# Altium PCB QN8027_89C52.PcbDoc
Units mil, origin at the board's own origin, x right, y up, seen from the top; angles counter-clockwise.
Board outline 3937.01 x 3937.01 mil, 2 copper layers (Top Layer, Bottom Layer); 41 components, 35 nets, 163 pads, 23 vias.
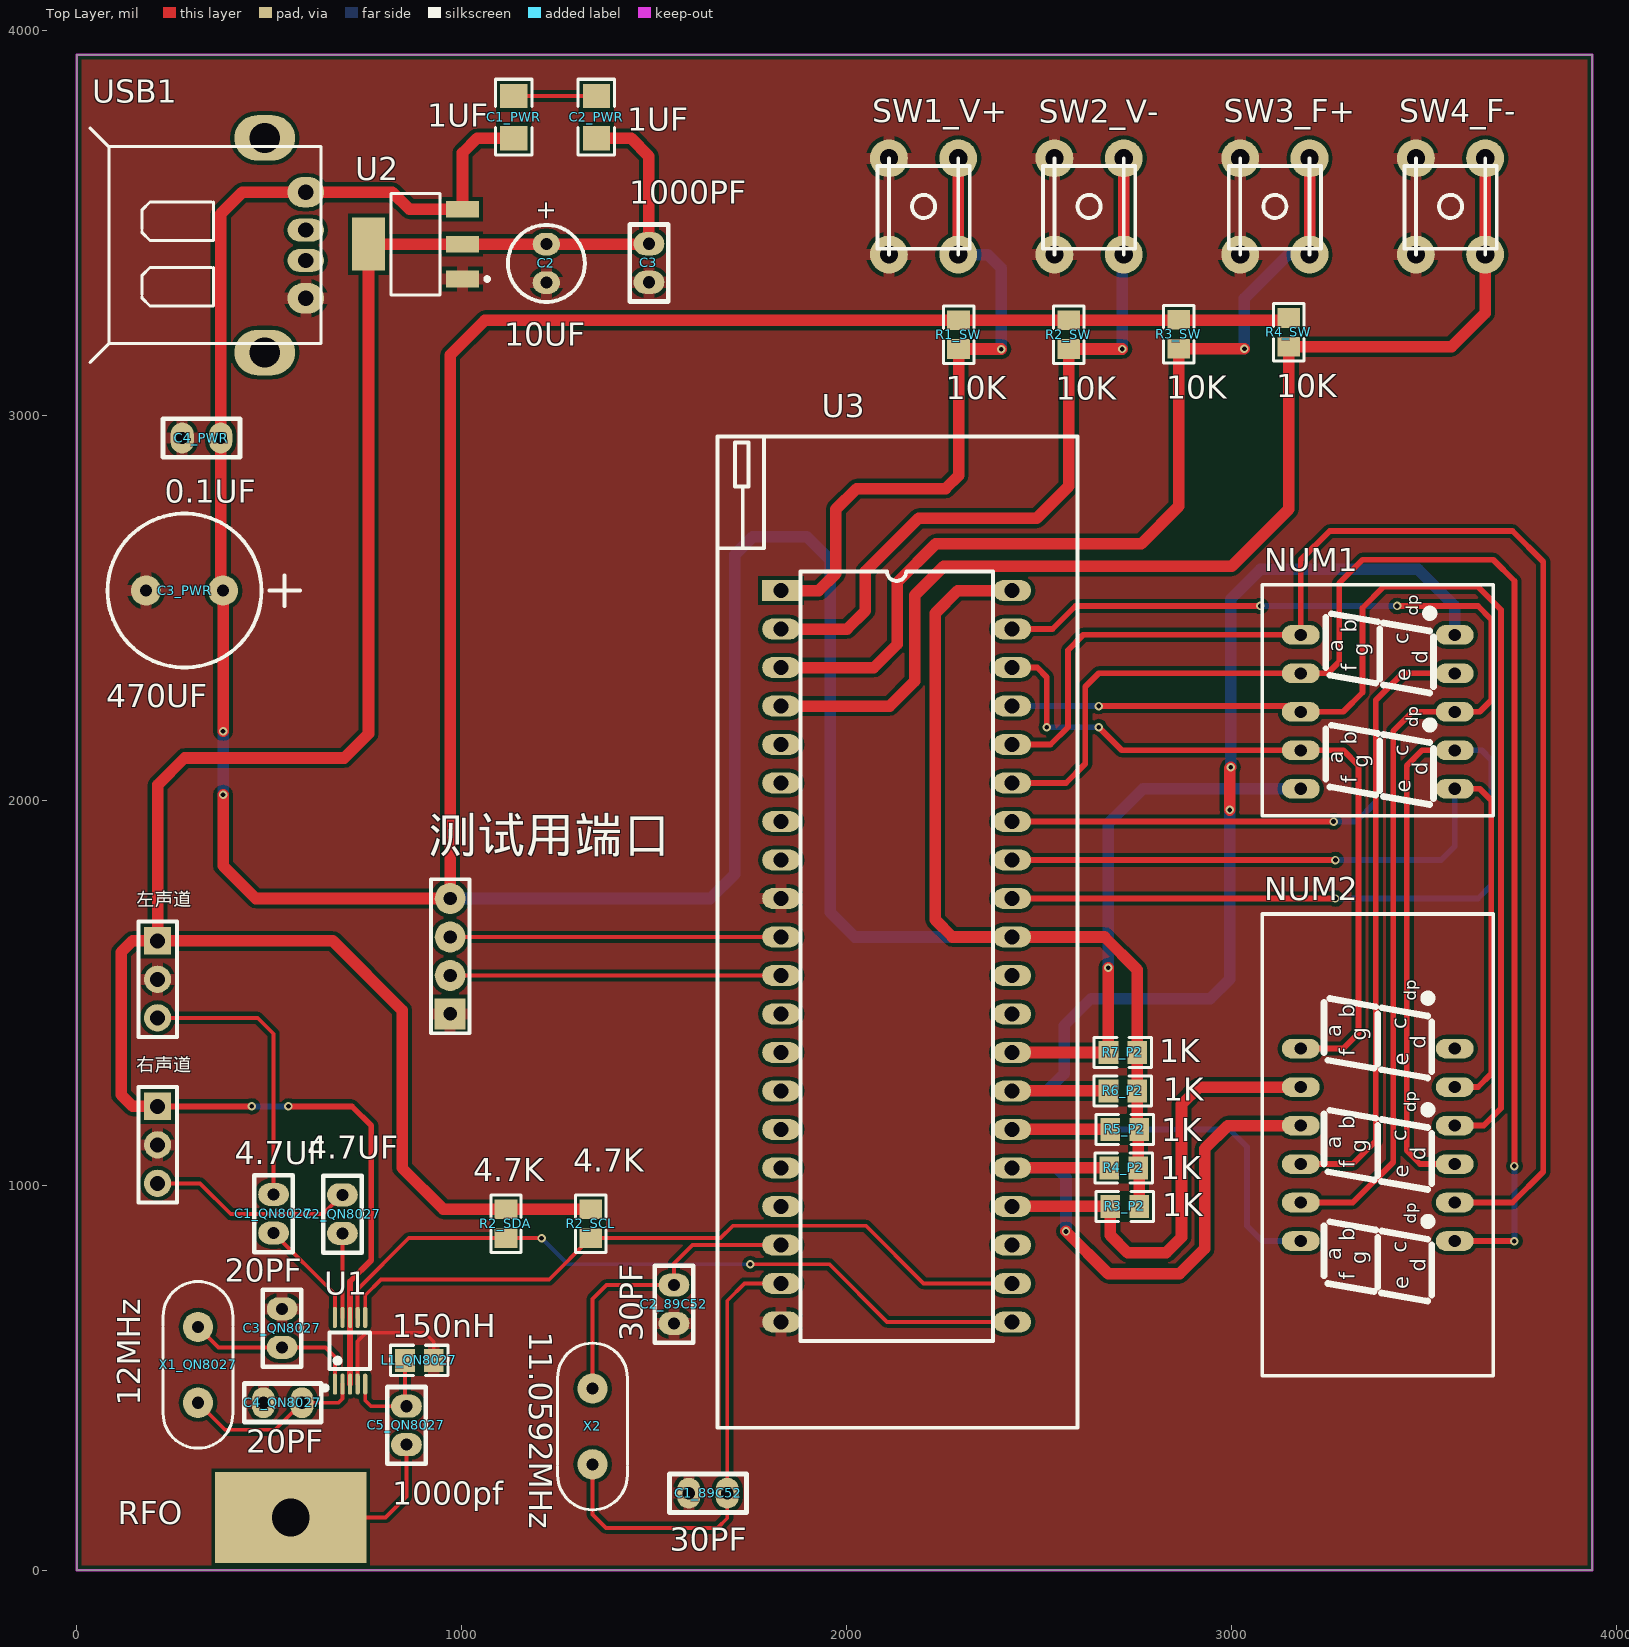
[diagram p0: Top Layer view]
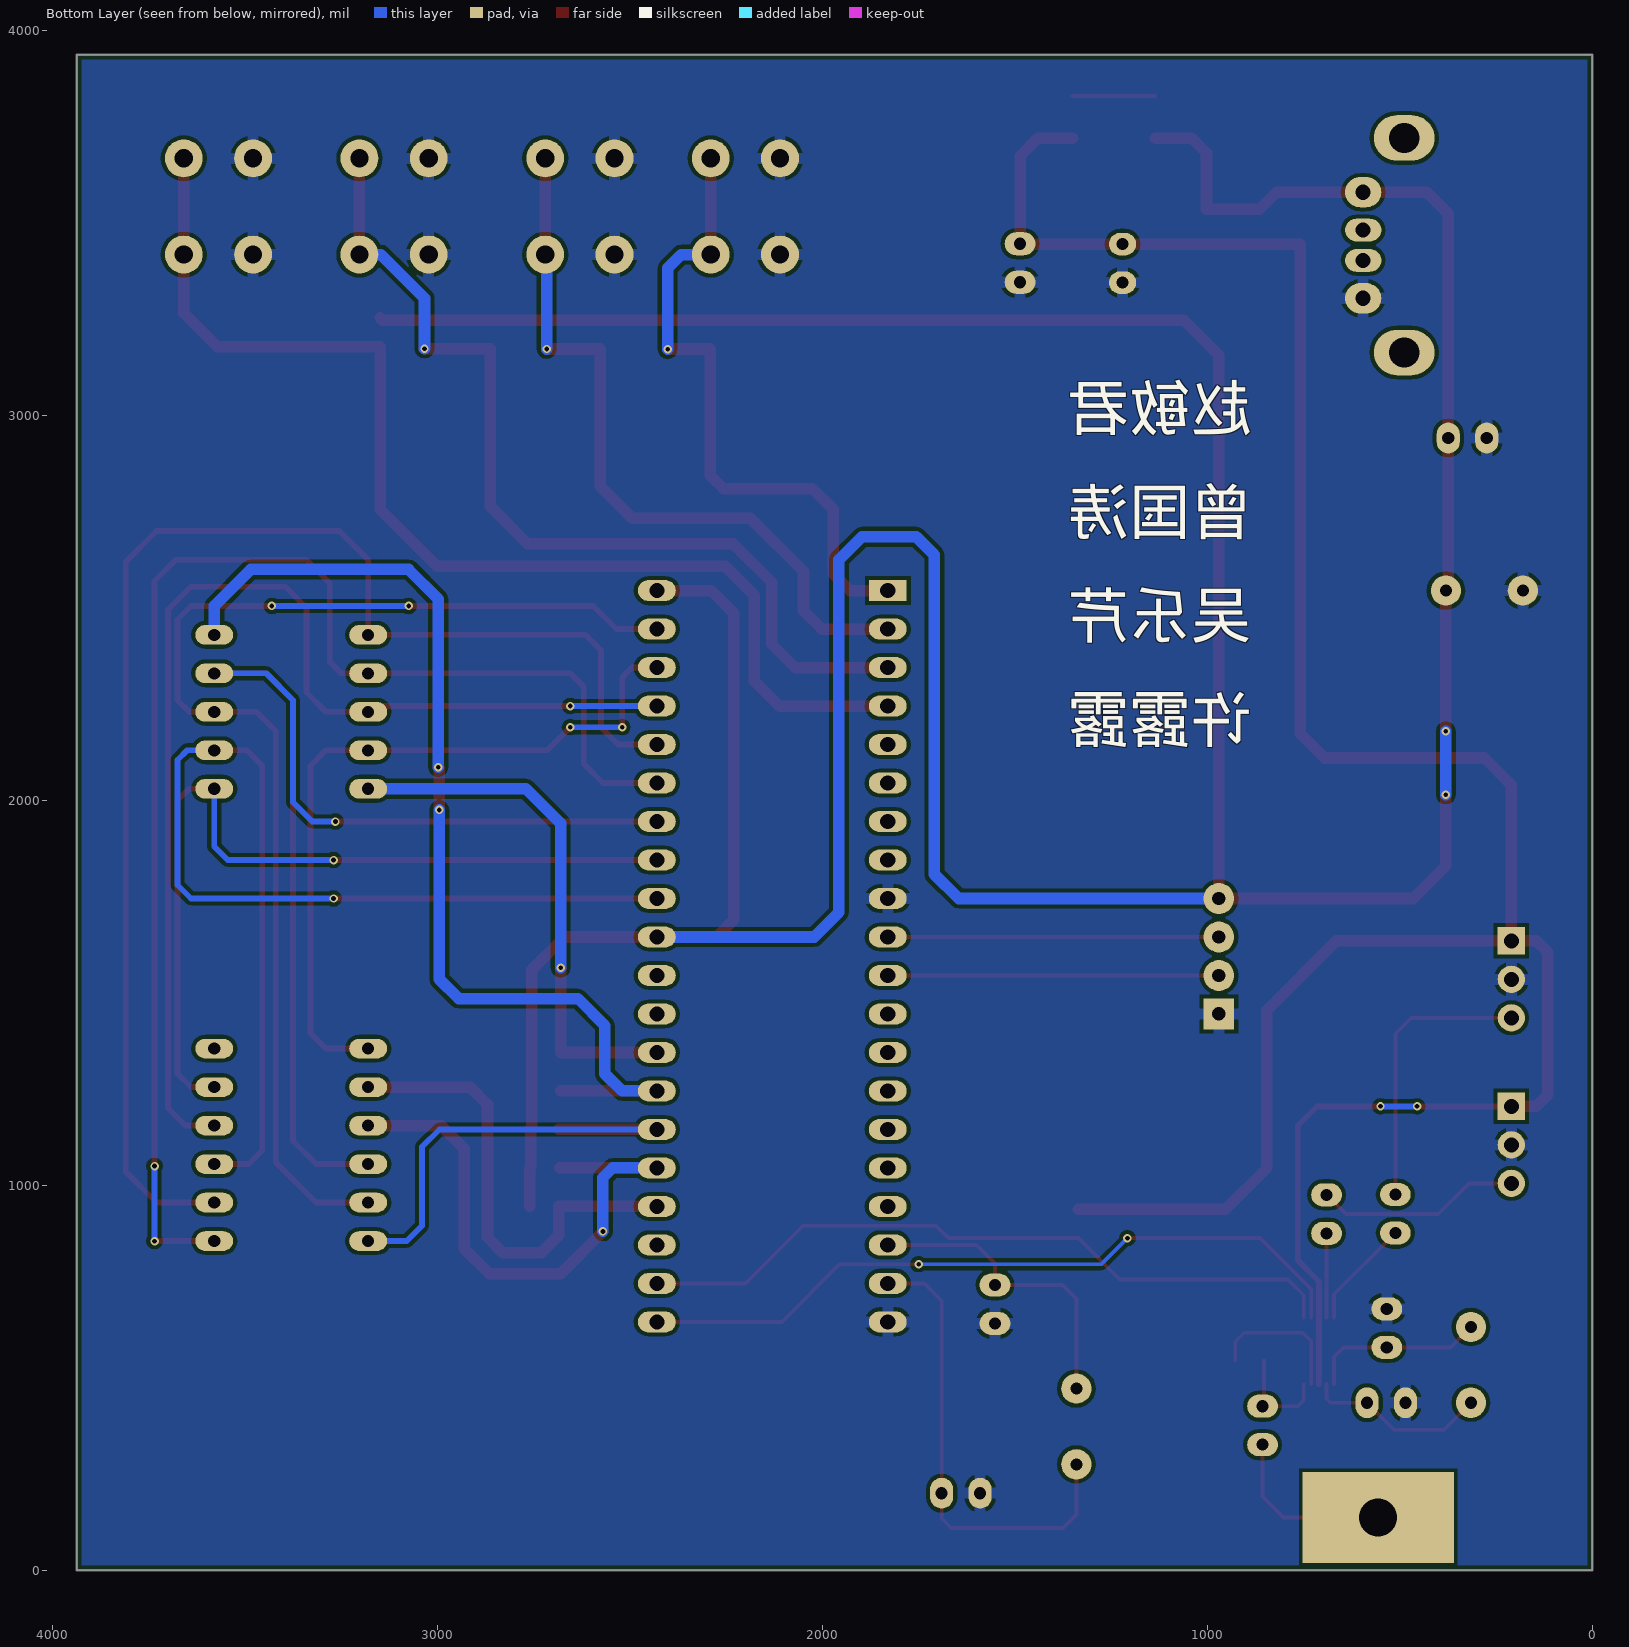
[diagram p1: Bottom Layer view, seen from below]
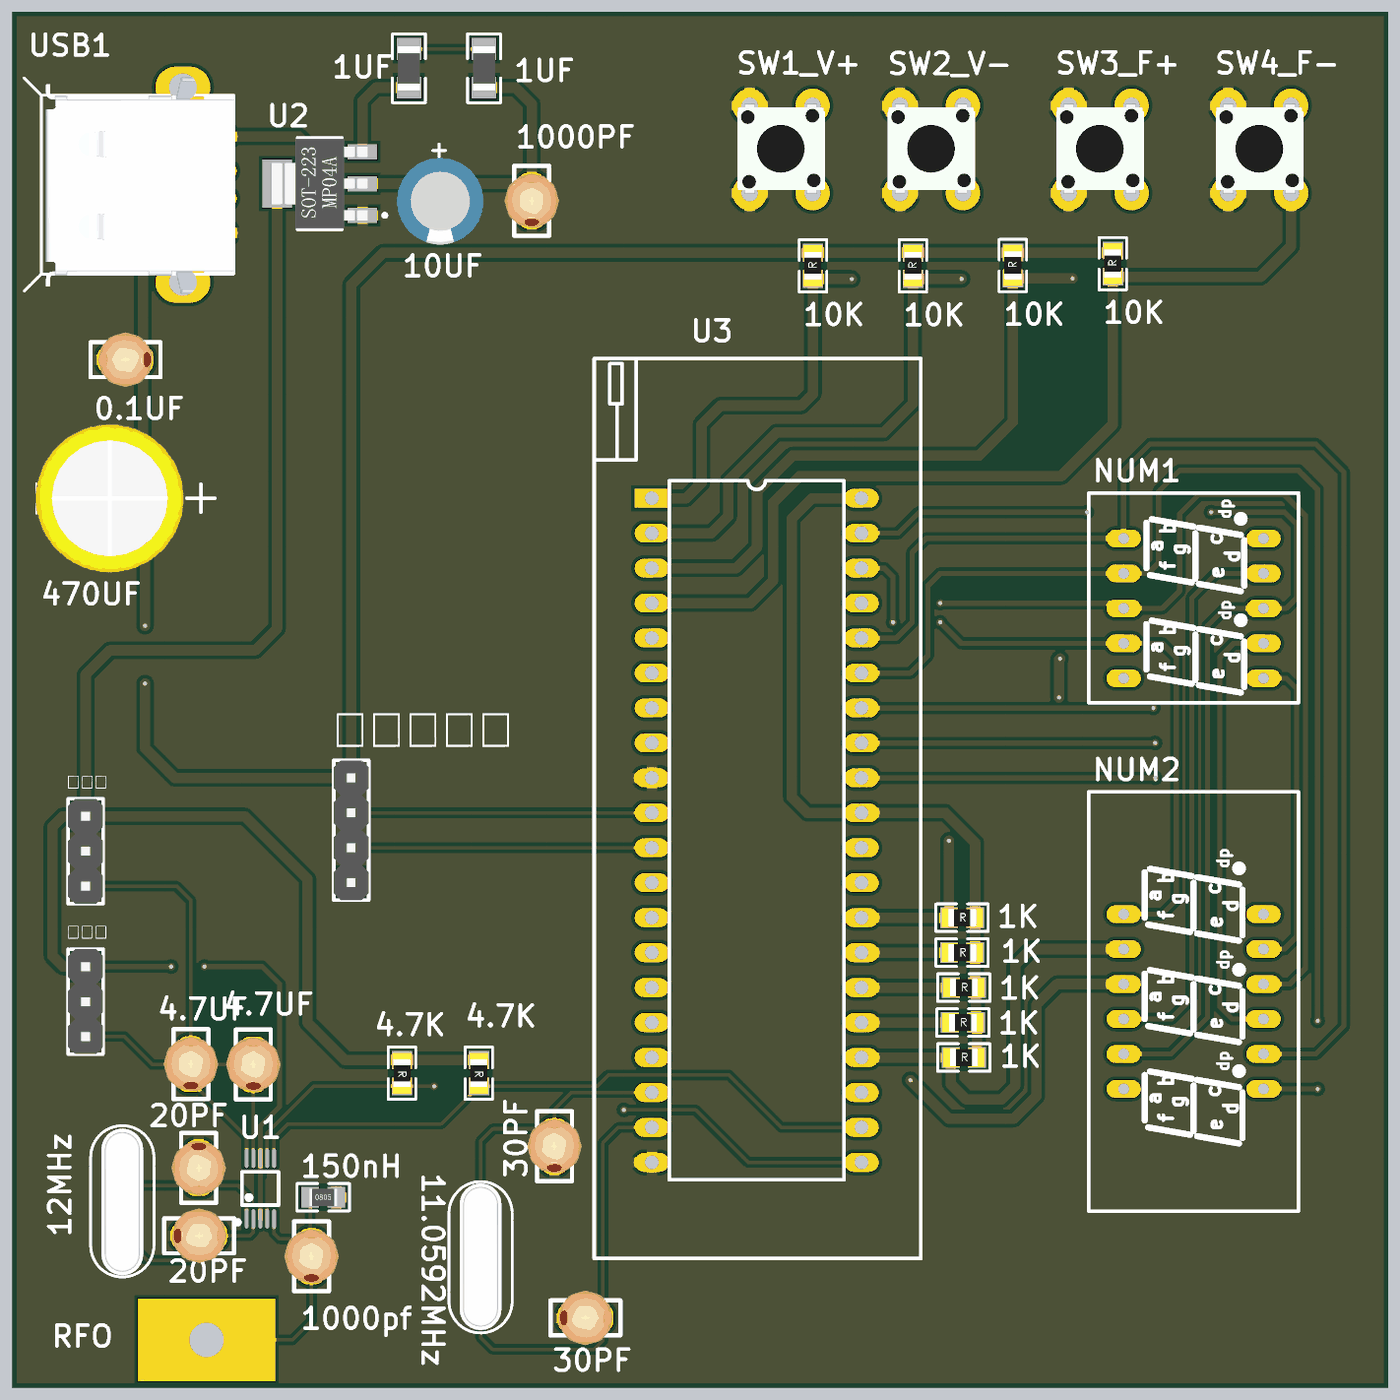
[diagram p2: 3D render of the assembled board from above, using the file's embedded part models]

## Layer stack, top to bottom
Top Solder: solder mask 0.4, Solder Resist, Dk 3.5
Top Layer: signal copper 1.4
Dielectric 1: dielectric 12.6, FR-4, Dk 4.8
Bottom Layer: signal copper 1.4
Bottom Solder: solder mask 0.4, Solder Resist, Dk 3.5

## Board outline
0,0 3937.01,0 3937.01,3937.01 0,3937.01

## Design rules (kind name [scope] priority, off if disabled: settings)
Clearance [(IsTrack) vs (IsTrack)] p1 off: gap=12
Clearance POLY [InPolygon] p2: gap=10
Clearance VIA-POLY [ISVIA vs InPolygon] p3: gap=6
Clearance all [All] p4: gap=6
DiffPairsRouting DiffPair_90DiffPairsRouting [InDifferentialPairClass('90OM')] p1: maxlimit=7 minlimit=7 mostfreqgap=7 toplayer_minwidth=6 toplayer_maxwidth=6 toplayer_prefwidth=6 bottomlayer_minwidth=6 bottomlayer_maxwidth=6 bottomlayer_prefwidth=6 maxuncoupledlength=500
MatchedLengths DiffPair_90MatchedLengths [InDifferentialPair ('D_D')] p1: tolerance=1000 checknetsindiffpair=FALSE checkdiffpairvsdiffpair=TRUE checkxsignals=TRUE checkothers=TRUE
PolygonConnect PolygonConnect_1 [ISVIA] p1: connectstyle=Direct reliefconductorwidth=10 reliefentries=4 polygonreliefangle="90 Angle" airgapwidth=10
PolygonConnect [All] p2: connectstyle=Relief reliefconductorwidth=30 reliefentries=4 polygonreliefangle="90 Angle" airgapwidth=10
RoutingVias [All] p1: holewidth=12 width=22 viastyle="Through Hole" minholewidth=12 minwidth=22 maxholewidth=12 maxwidth=22
SilkToSilkClearance [All] p1: silktosilkclearance=2
SilkToSolderMaskClearance [IsPad] p1: minsilkscreentomaskgap=2 clearancetoexposedcopper=TRUE
SolderMaskExpansion [All] p1: expansion=2.5
Width PWR [InNetClass('PWR')] p1: maxlimit=60 minlimit=6 preferedwidth=15
Width [All] p2: maxlimit=45 minlimit=6 preferedwidth=6
27 further rules are at their usual default settings.

## Classes and differential pairs
net class PWR: 3.3V 5V

## Components (designator, comment, footprint, x,y, rotation, side; value= is the part's Value field where it differs from the comment)
C1_89C52 "30PF" RAD-0.1 1638.94,201.38 r180 top
C1_PWR "1UF" 1206 1135,3775 r90 top
C1_QN8027 "4.7UF" RAD-0.1 510,925 r270 top
C2 "10UF" RB.1/.2 1220,3345 r90 top
C2_89C52 "30PF" RAD-0.1 1550,690 r270 top
C2_PWR "1UF" 1206 1350,3775 r90 top
C2_QN8027 "4.7UF" RAD-0.1 688.62,923.94 r270 top
C3 "1000PF" RAD-0.1 1485,3395 r270 top
C3_PWR "470UF" RB.2/.4 180,2545 r0 top
C3_QN8027 "20PF" RAD-0.1 535,630 r90 top
C4_PWR "0.1UF" RAD-0.1 325,2940 r0 top
C4_QN8027 "20PF" RAD-0.1 533.94,436.38 r180 top
C5_QN8027 "1000pf" RAD-0.1 855,375 r270 top
L1_QN8027 "150nH" 0805 890,545 r0 top
NUM1 "LEDNUM_2位7段数码管共阳极" LEDNUM_2位7段数码管 3180,2030 r90 top
NUM2 "频率" LEDNUM_3位7段数码管 3180,855 r90 top
R1_SW "10K" "0805 RES" 2291,3210 r90 top
R2_SCL "4.7K" "0805 RES" 1335,900 r270 top
R2_SDA "4.7K" "0805 RES" 1115,900 r270 top
R2_SW "10K" "0805 RES" 2577,3210 r90 top
R3_P2 "1K" "0805 RES" 2722.6,945 r0 top
R3_SW "10K" "0805 RES" 2863,3211 r90 top
R4_P2 "1K" "0805 RES" 2720,1045 r0 top
R4_SW "10K" "0805 RES" 3149,3216 r90 top
R5_P2 "1K" "0805 RES" 2722.6,1145 r0 top
R6_P2 "1K" "0805 RES" 2717.6,1245 r0 top
R7_P2 "1K" "0805 RES" 2717.6,1345 r0 top
RFO "天线贴片" 天线贴孔 556,137 r180 top
SW1_V+ "6*6" 6*6按键开关 2110,3668 r0 top
SW2_V- "6*6_4脚按键开关" 6*6按键开关 2540,3668 r0 top
SW3_F+ "6*6_4脚按键开关" 6*6按键开关 3022.67,3668 r0 top
SW4_F- "6*6_4脚按键开关" 6*6按键开关 3479,3668 r0 top
U1 "QN8027_MSOP10" MSOP-10 710,570 r0 top
U2 "AMS1117" SOT223 880,3445 r90 top
U3 "STC89C52_Plug" ZIF40 1830,2545 r0 top
USB1 "USB母口" USB-A 595,3580 r180 top
X1_QN8027 "12MHz" XTAL1 315,631.85 r270 top
X2 "11.0592MHz" XTAL1 1340,275 r90 top
右声道 "HEADER_Plug_1*3" HDR1*3 210,1205 r0 top
左声道 "HEADER_Plug_1*3" HDR1*3 210,1635 r0 top
测试用端口 "HEADER_Plug_1*4" HDR1*4 970,1445 r180 top

## Footprints (in the part's own frame and the unit in brackets; to place one, negate y for a bottom-side part, rotate by r counter-clockwise, add the part's x,y. Pads: shape width x height; smd on the part's side, far side on the other; paste and mask are expansions set on the pad)
6*6按键开关 [mm]
  round 2.5 hole 1.2: 1(0,-6.35) 1(0,0) 2(4.572,-6.35) 2(4.572,0)
  silkscreen extent -0.76,-6.35 5.33,0, body extent -0.84,-6.4 5.36,0.15, height 5
0805 [mm]
  rect 1.3x1.5 smd: 1(-0.95,0) 2(0.95,0)
  silkscreen extent -1.9,-1 1.9,1, body extent -1,-0.63 1,0.63, height 0.55
"0805 RES" [mm]
  rect 1.3x1.5 smd: 1(-0.95,0) 2(0.95,0)
  silkscreen extent -1.9,-1 1.9,1, body extent -1.49,-0.7 1.51,0.7, height 0.53
1206 [mm]
  rect 1.6x1.8 smd: 1(-1.4,0) 2(1.4,0)
  silkscreen extent -2.5,-1.2 2.5,1.2, body extent -1.6,-0.81 1.6,0.81, height 0.61
HDR1*3 [mm]
  rect 1.8x1.8 hole 1: 1(0,0)
  round 1.8 hole 1: 2(0,-2.54) 3(0,-5.08)
  silkscreen extent -1.27,-6.35 1.27,1.27, body extent -1.27,-6.35 1.27,1.27, height 8.54
HDR1*4 [mil]
  rect 80x80 hole 35: 1(0,0)
  round 80 hole 35: 2(0,-100) 3(0,-200) 4(0,-300)
  silkscreen extent -50,-350 50,50, body extent -50,-350 50,50, height 336
LEDNUM_2位7段数码管 [mm]
  oval 1.3x2.5 hole 0.8: 1(0,-10.16) 2(2.54,-10.16) 3(5.08,-10.16) 4(7.62,-10.16) 5(10.16,-10.16) 6(10.16,0) 7(7.62,0) 8(5.08,0) 9(2.54,0) 10(0,0)
  silkscreen extent -1.78,-12.7 13.46,2.54
LEDNUM_3位7段数码管 [mm]
  oval 1.3x2.5 hole 0.8: 1(0,-10.16) 2(2.54,-10.16) 3(5.08,-10.16) 4(7.62,-10.16) 5(10.16,-10.16) 6(12.7,-10.16) 7(12.7,0) 8(10.16,0) 9(7.62,0) 10(5.08,0) 11(2.54,0) 12(0,0)
  silkscreen extent -8.89,-12.7 21.59,2.54
MSOP-10 [mm]
  oval 0.28x1.4 smd mask+0.051: 1(-1,-2.2) 2(-0.5,-2.2) 3(0,-2.2) 4(0.5,-2.2) 5(1,-2.2) 6(1,2.2) 7(0.5,2.2) 8(0,2.2) 9(-0.5,2.2) 10(-1,2.2)
  silkscreen extent -1.8,-2.6 1.33,1.2
RAD-0.1 [mil]
  oval 60x80 hole 31.5: 1(-51.06,1.38) 2(48.94,1.38)
  silkscreen extent -101,-49 99,51, body extent -79,-77 77,80, height 291
RB.1/.2 [mm]
  oval 1.5x1.8 hole 0.8: 1(2.54,0) 2(0,0)
  silkscreen extent -1.27,-2.54 3.81,2.54, body extent -1.88,-3.26 4.42,3.04, height 11.5
RB.2/.4 [mm]
  round 2 hole 0.8: 1(5.08,0) 2(0,0)
  silkscreen extent -2.54,-5.08 10.16,5.08, body extent -2.89,-5.41 7.92,5.39, height 13
SOT223 [mm]
  rect 1.1x2.15 smd: 1(-2.3,-3.1) 2(0,-3.1) 3(2.3,-3.1)
  rect 3.5x2.15 smd: 2(0,3.1)
  silkscreen extent -3.35,-4.85 3.35,1.63, body extent -3.25,-3.48 3.25,3.48, height 1.7
USB-A [mm]
  oval 4x3 hole 2: 0(2.71,10.58) 0(2.71,-3.58)
  oval 2.4x2 hole 1: 1(0,0) 4(0,7)
  oval 2.4x1.5 hole 1: 2(0,2.5) 3(0,4.5)
  silkscreen extent -1,-4.25 14.25,11.23, body extent -1.04,-4.34 12.66,11.46, height 6.95
XTAL1 [mm]
  round 2 hole 0.8: 1(0,0) 2(5,0)
  silkscreen extent -3,-2.3 8,2.3, body extent -2.79,-1.52 7.87,1.52, height 3.09
ZIF40 [mm]
  rect 2.5x1.38 hole 1: 1(0,0)
  oval 2.5x1.38 hole 1: 2(0,-2.54) 3(0,-5.08) 4(0,-7.62) 5(0,-10.16) 6(0,-12.7) 7(0,-15.24) 8(0,-17.78) 9(0,-20.32) 10(0,-22.86) 11(0,-25.4) 12(0,-27.94) 13(0,-30.48) 14(0,-33.02) 15(0,-35.56) 16(0,-38.1) 17(0,-40.64) 18(0,-43.18) 19(0,-45.72) 20(0,-48.26) 21(15.24,-48.26) 22(15.24,-45.72) 23(15.24,-43.18) 24(15.24,-40.64) 25(15.24,-38.1) 26(15.24,-35.56) 27(15.24,-33.02) 28(15.24,-30.48) 29(15.24,-27.94) 30(15.24,-25.4) 31(15.24,-22.86) 32(15.24,-20.32) 33(15.24,-17.78) 34(15.24,-15.24) 35(15.24,-12.7) 36(15.24,-10.16) 37(15.24,-7.62) 38(15.24,-5.08) 39(15.24,-2.54) 40(15.24,0)
  silkscreen extent -4.19,-55.24 19.56,10.16
天线贴孔 [mm]
  rect 10x6 hole 2.5: 1(0,0)

## Part data
C1_89C52 C1_QN8027 C2_89C52 C2_QN8027 C3 C3_QN8027 C4_PWR C4_QN8027 C5_QN8027: library part CAP_直插式电容_2.54
C1_PWR C2_PWR: library part CAP_1206贴片电容
C2 C3_PWR: library part CAP_直插式极性电容
L1_QN8027: library part L_直插式电感
NUM2: library part LEDNUM_3位7段数码管共阳极_5361
R1_SW R2_SCL R2_SDA R2_SW R3_P2 R3_SW R4_P2 R4_SW R5_P2 R6_P2 R7_P2: library part RES_贴片式电阻
SW1_V+: library part 6*6_4脚按键开关
U2: library part 贴片芯片_AMS1117_SOT223
U3: library part 直插芯片_STC89C52
X1_QN8027 X2: library part XTAL_直插式晶振_4.88MM
右声道 左声道: library part HEADER_直插式排针_1*3P
测试用端口: library part HEADER_直插式排针_1*4P

## Via types
v1: diameter 22, hole 12, Top Layer to Bottom Layer, tented both sides, 23 vias

## Nets (pads, with @x,y where several pads share a name; then routed paths per layer and width w, separated by ;. In a path a pad name is that pad's centre, name@x,y a point inside that pad or via, vN(x,y) a via of type N, cw(c..) or ccw(c..) an arc to the next point about the centre after c; other vN are vias at no path point)
3.3V: C2.1 C2_PWR.1 C3.1 R2_SCL.1 R2_SDA.1 U1.3 U1.8 U2.2 右声道.1 左声道.1 | length 6901.1
  Top Layer w15: 右声道.1 v1(455,1205) ; v1(550,1205) 715,1205 765,1155 765,805 710,750 U1.8 U1.3
  Top Layer w30: 右声道.1 145,1205 115,1235 115,1605 145,1635 左声道.1 ; R2_SCL.1 R2_SDA.1 952.6,937.4 845,1045 845,1455 665,1635 左声道.1 ; C2_PWR.1 1440.12,3719.88 1486.38,3673.62 C3.1 1485.31,3445 C2.1 1002.05,3445 757.95,3445 757.95,2172.95 695,2110 280,2110 210,2040 左声道.1
  Bottom Layer w15: v1(455,1205) v1(550,1205)
5V: C1_PWR.1 C3_PWR.1 C4_PWR.2 R1_SW.2 R2_SW.2 R3_P2.2 R3_SW.2 R4_P2.2 R4_SW.2 R5_P2.2 R6_P2.2 R7_P2.2 U2.3 U3.31 U3.40 USB1.1 测试用端口.4 | length 12438.9
  Top Layer w30: v1(380,2015) 380,1830 465,1745 测试用端口.4 970,3157 1060.4,3247.4 R1_SW.2 R2_SW.2 3143,3247.4 R4_SW.2 ; v1(380,2180) C3_PWR.1 373.94,2551.06 C4_PWR.2 373.94,3523.94 430,3580 USB1.1 820,3580 864.45,3535.55 U2.3 1002.05,3682.05 1039.88,3719.88 C1_PWR.1 ; U3.40 2289,2545 2230,2486 2230,1690 2275,1645 U3.31 2670,1645 2755,1560 R7_P2.2 R6_P2.2 2755,1150 R5_P2.2 2757.4,1142.4 R4_P2.2 2760,1042.4 R3_P2.2
  Bottom Layer w30: v1(380,2015) v1(380,2180) ; 测试用端口.4 1646,1745 1709,1808 1709,2638 1756,2685 1897,2685 1957,2625 1957,1709 2021,1645 U3.31
A: NUM1.3 NUM2.11 U3.39 | length 3186
  Top Layer w15: U3.39 2535,2445 2595,2505 v1(3075,2505) ; NUM2.11 3315,955 3420,1060 3420,2180 3470,2230 NUM1.3 3645,2230 3675,2260 3675,2470 3640,2505 v1(3430,2505)
  Bottom Layer w15: v1(3075,2505) v1(3430,2505)
ALI: C1_QN8027.1 左声道.3 | length 736.1
  Top Layer w10: 左声道.3 470,1435 511.38,1393.62 C1_QN8027.1
ARI: C2_QN8027.1 右声道.3 | length 533.8
  Top Layer w10: 右声道.3 320,1005 400,925 640,925 C2_QN8027.1
B: NUM1.9 NUM2.7 U3.38 | length 1943.3
  Top Layer w15: U3.38 2495,2345 2520,2320 v1(2520,2190) ; v1(2655,2190) 2715,2130 NUM1.9 3290,2130 3330,2090 3330,1395 3290,1355 NUM2.7
  Bottom Layer w15: v1(2520,2190) v1(2655,2190)
C: NUM1.8 NUM2.4 U3.37 | length 2998.2
  Top Layer w15: v1(2655,2245) 3165,2245 NUM1.8 3290,2230 3340,2280 3340,2500 3395,2555 3640,2555 3700,2495 3700,1200 3655,1155 NUM2.4
  Bottom Layer w15: U3.37 v1(2655,2245)
D: NUM1.6 NUM2.2 U3.36 | length 3722.5
  Top Layer w15: U3.36 2530,2145 2575,2190 2575,2390 2615,2430 NUM1.6 3180,2625 3255,2700 3730,2700 3810,2620 3810,1035 3730,955 NUM2.2
DP: NUM1.2 NUM2.3 U3.32 | length 2970.9
  Top Layer w15: U3.32 v1(3270,1745) ; NUM2.3 3490,1055 3455,1090 3455,2090 3495,2130 NUM1.2
  Bottom Layer w15: v1(3270,1745) 3640,1745 3675,1780 3675,2105 3650,2130 NUM1.2
E: NUM1.7 NUM2.1 U3.35 | length 3675.3
  Top Layer w15: U3.35 2570,2045 2620,2095 2620,2295 2655,2330 NUM1.7 3250,2330 3280,2360 3280,2565 3340,2625 3680,2625 3735,2570 v1(3735,1050) ; NUM2.1 v1(3735,855)
  Bottom Layer w15: v1(3735,855) v1(3735,1050)
F: NUM1.4 NUM2.10 U3.34 | length 3063.6
  Top Layer w15: U3.34 v1(3265,1945) ; NUM2.10 3315,1055 3375,1115 3375,2260 3445,2330 NUM1.4
  Bottom Layer w15: v1(3265,1945) 3325,1945 3375,1995 3375,2260 3445,2330 NUM1.4
F_1: NUM2.12 R5_P2.1 U3.26 | length 1245.4
  Top Layer w30: U3.26 R5_P2.1
  Bottom Layer w15: U3.26 2995,1145 3040,1100 3040,895 3080,855 NUM2.12
F_2: NUM2.9 R4_P2.1 U3.25 | length 1510.3
  Top Layer w30: U3.25 R4_P2.1 ; v1(2570,880) 2680,770 2865,770 2930,835 2930,1095 2990,1155 NUM2.9
  Bottom Layer w30: U3.25 2545,1045 2570,1020 v1(2570,880)
F_3: NUM2.8 R3_P2.1 U3.24 | length 1224
  Top Layer w30: U3.24 R3_P2.1 2685.2,869.8 2730,825 2830,825 2870,865 2870,1210 2915,1255 NUM2.8
G: NUM1.1 NUM2.5 U3.33 | length 2241.4
  Top Layer w15: U3.33 v1(3270,1845) ; NUM2.5 3640,1255 3675,1290 3675,2000 3645,2030 NUM1.1
  Bottom Layer w15: v1(3270,1845) 3545,1845 3580,1880 NUM1.1
GND: C1_89C52.2 C2.2 C2_89C52.2 C3.2 C3_PWR.2 C3_QN8027.2 C4_PWR.1 C4_QN8027.2 L1_QN8027.2 SW1_V+.1 SW2_V-.1 SW3_F+.1 SW4_F-.1 U1.4 U2.1 U3.9 U3.20 USB1.4 右声道.2 左声道.2 测试用端口.1 | length 376.6
  Top Layer w10: U1.4 729.69,594.68 752,617 904,617 927.4,593.6 L1_QN8027.2
NetC1_89C52_1: C1_89C52.1 U3.19 X2.1 | length 1228.5
  Top Layer w10: X2.1 1340,145 1375,110 1665,110 1690,135 C1_89C52.1 1690,700 1735,745 U3.19
NetC1_PWR_2: C1_PWR.2 C2_PWR.2 | length 215
  Top Layer w10: C1_PWR.2 C2_PWR.2
NetC1_QN8027_2: C1_QN8027.2 U1.10 | length 285.4
  Top Layer w10: C1_QN8027.2 670.63,716.81 U1.10
NetC2_89C52_1: C2_89C52.1 U3.18 X2.2 | length 813.5
  Top Layer w10: X2.2 1340,705 1376.06,741.06 C2_89C52.1 1551.38,796.38 1600,845 U3.18
NetC2_QN8027_2: C2_QN8027.2 U1.9 | length 218.5
  Top Layer w10: C2_QN8027.2 690,656.93 U1.9
NetC3_QN8027_1: C3_QN8027.1 U1.1 X1_QN8027.1 | length 458.7
  Top Layer w10: X1_QN8027.1 367.91,578.94 C3_QN8027.1 646.06,578.94 670.63,554.37 U1.1
NetC4_QN8027_1: C4_QN8027.1 U1.2 X1_QN8027.2 | length 475.6
  Top Layer w10: X1_QN8027.2 385,365 515,365 C4_QN8027.1 680,435 690.31,445.31 U1.2
NetC5_QN8027_1: C5_QN8027.1 L1_QN8027.1 U1.5 | length 276.3
  Top Layer w10: U1.5 749.37,440.63 763.94,426.06 C5_QN8027.1 852.6,429.84 L1_QN8027.1
NetC5_QN8027_2: C5_QN8027.2 RFO.1 | length 457.8
  Top Layer w10: RFO.1 802.38,137 856.38,191 C5_QN8027.2
NetU3_10: U3.10 测试用端口.3 | length 860
  Top Layer w10: 测试用端口.3 U3.10
NetU3_11: U3.11 测试用端口.2 | length 860
  Top Layer w10: 测试用端口.2 U3.11
P10_V+: R1_SW.1 SW1_V+.2 U3.1 | length 1710
  Top Layer w30: U3.1 1928,2545 1972,2589 1972,2756 2026,2810 2257,2810 2291,2844 R1_SW.1 2401.4,3172.6 v1(2402,3172) ; SW1_V+.2@2290,3418 SW1_V+.2@2290,3668
  Bottom Layer w30: SW1_V+.2@2290,3418 2367,3418 2402,3383 v1(2402,3172)
P11_V-: R2_SW.1 SW2_V-.2 U3.2 | length 1953.3
  Top Layer w30: U3.2 2001,2445 2049,2493 2049,2595 2187,2733 2494,2733 2577,2816 R2_SW.1 v1(2716.4,3172.6) ; SW2_V-.2@2720,3418 SW2_V-.2@2720,3668
  Bottom Layer w30: v1(2716.4,3172.6) 2716.4,3414.4 SW2_V-.2@2720,3418
P12_F+: R3_SW.1 SW3_F+.2 U3.3 | length 2478.1
  Top Layer w30: U3.3 2071,2345 2131,2405 2131,2566 2232,2667 2766,2667 2863,2764 R3_SW.1 v1(3033.6,3173.6) ; SW3_F+.2@3202.67,3418 SW3_F+.2@3202.67,3668
  Bottom Layer w30: v1(3033.6,3173.6) 3033.6,3304.6 3147,3418 SW3_F+.2@3202.67,3418
P13_F-: R4_SW.1 SW4_F-.2 U3.4 | length 3032.1
  Top Layer w30: U3.4 2112,2245 2177,2310 2177,2533 2252,2608 3001,2608 3149,2756 R4_SW.1 3571.6,3178.6 3659,3266 3659,3418 SW4_F-.2@3659,3668
SCL: R2_SCL.2 U1.6 U3.22 | length 1875.3
  Top Layer w10: U1.6 749.37,714.37 790,755 1227.4,755 R2_SCL.2 1672.6,862.6 1705,895 2050,895 2200,745 U3.22
SDA: R2_SDA.2 U1.7 U3.21 | length 1918.6
  Top Layer w10: U1.7 729.69,729.69 862.6,862.6 R2_SDA.2 v1(1207.4,862.6) ; v1(1750,795) 1955,795 2105,645 U3.21
  Bottom Layer w10: v1(1207.4,862.6) 1275,795 v1(1750,795)
VOIDE_1: NUM1.10 R7_P2.1 U3.28 | length 1382.6
  Top Layer w30: U3.28 R7_P2.1 2680,1345.2 v1(2680,1565)
  Bottom Layer w30: v1(2680,1565) 2680,1940 2770,2030 NUM1.10
VOIDE_2: NUM1.5 R6_P2.1 U3.27 | length 2726
  Top Layer w30: U3.27 R6_P2.1 ; v1(2995,1975) 2995,2083 v1(2998,2086)
  Bottom Layer w30: U3.27 2520,1245 2565,1290 2565,1415 2635,1485 2945,1485 2995,1535 v1(2995,1975) ; v1(2998,2086) 2998,2523 3075,2600 3485,2600 3580,2505 NUM1.5
pads on no net: NUM2.6 U3.5 U3.6 U3.7 U3.8 U3.12 U3.13 U3.14 U3.15 U3.16 U3.17 U3.23 U3.29 U3.30 USB1.0 USB1.2 USB1.3

## Polygon pours and split planes (outlines as drawn)
GND on Top Layer "Top Layer-No Net" (solid, remove dead copper, pour order 4): 5,6 6,7 3930,7 3930,3930 5,3930
GND on Bottom Layer "Top Layer-No Net" (solid, remove dead copper, pour order 6): 7,5 3926,5 3930,9 3930,3930 6,3930

## Keep-outs
Keep-Out Layer:
  the board outline again, w6

## Silkscreen, mask and mechanical layers (free items; w line width, h text height)
Bottom Overlay:
  text "赵敏君" at 883,2924 h200
  text "曾国涛" at 883.19,2653.85 h200
  text "吴乐芹" at 883,2384.44 h200
  text "许露露" at 883.19,2113 h200

## Text inside footprints (layer, text, board x,y; h text height)
C2: Top Overlay "+" at 1240,3505 h48 r90
NUM1: Top Overlay "dp" at 3485,2190 h31.5 r90; Top Overlay "c" at 3460,2115 h39.37 r90; Top Overlay "e" at 3465,2020 h39.37 r90; Top Overlay "d" at 3510,2065 h39.37 r90; Top Overlay "a" at 3290,2095 h39.37 r90; Top Overlay "g" at 3355,2085 h39.37 r90; Top Overlay "b" at 3325,2145 h39.37 r90; Top Overlay "f" at 3325,2045 h39.37 r90; Top Overlay "f" at 3325,2335 h39.37 r90; Top Overlay "b" at 3325,2435 h39.37 r90; Top Overlay "g" at 3355,2375 h39.37 r90; Top Overlay "a" at 3290,2385 h39.37 r90; Top Overlay "d" at 3510,2355 h39.37 r90; Top Overlay "e" at 3465,2310 h39.37 r90; Top Overlay "c" at 3460,2405 h39.37 r90; Top Overlay "dp" at 3485,2480 h31.5 r90
NUM2: Top Overlay "dp" at 3480,900 h31.5 r90; Top Overlay "c" at 3455,825 h39.37 r90; Top Overlay "e" at 3460,730 h39.37 r90; Top Overlay "d" at 3505,775 h39.37 r90; Top Overlay "a" at 3285,805 h39.37 r90; Top Overlay "g" at 3350,795 h39.37 r90; Top Overlay "b" at 3320,855 h39.37 r90; Top Overlay "f" at 3320,755 h39.37 r90; Top Overlay "f" at 3320,1045 h39.37 r90; Top Overlay "b" at 3320,1145 h39.37 r90; Top Overlay "g" at 3350,1085 h39.37 r90; Top Overlay "a" at 3285,1095 h39.37 r90; Top Overlay "d" at 3505,1065 h39.37 r90; Top Overlay "e" at 3460,1020 h39.37 r90; Top Overlay "c" at 3455,1115 h39.37 r90; Top Overlay "dp" at 3480,1190 h31.5 r90; Top Overlay "f" at 3320,1335 h39.37 r90; Top Overlay "b" at 3320,1435 h39.37 r90; Top Overlay "g" at 3350,1375 h39.37 r90; Top Overlay "a" at 3285,1385 h39.37 r90; Top Overlay "d" at 3505,1355 h39.37 r90; Top Overlay "e" at 3460,1310 h39.37 r90; Top Overlay "c" at 3455,1405 h39.37 r90; Top Overlay "dp" at 3480,1480 h31.5 r90